# Allegro board ESP32_LED.brd
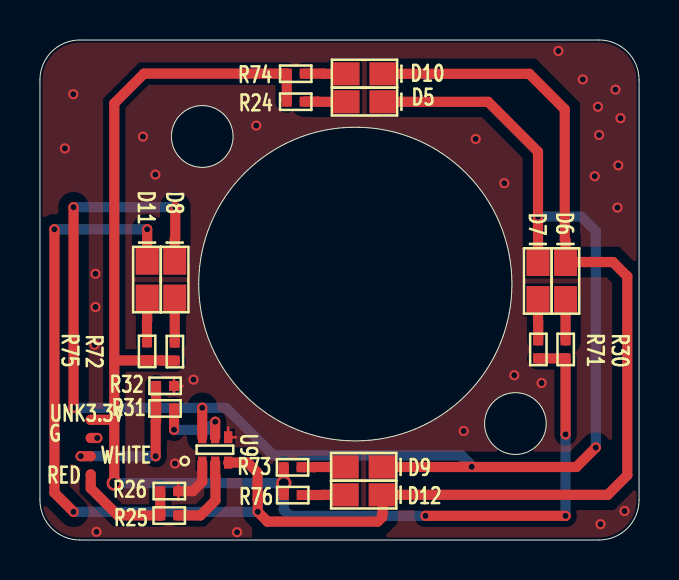
[diagram p0: board, top side]
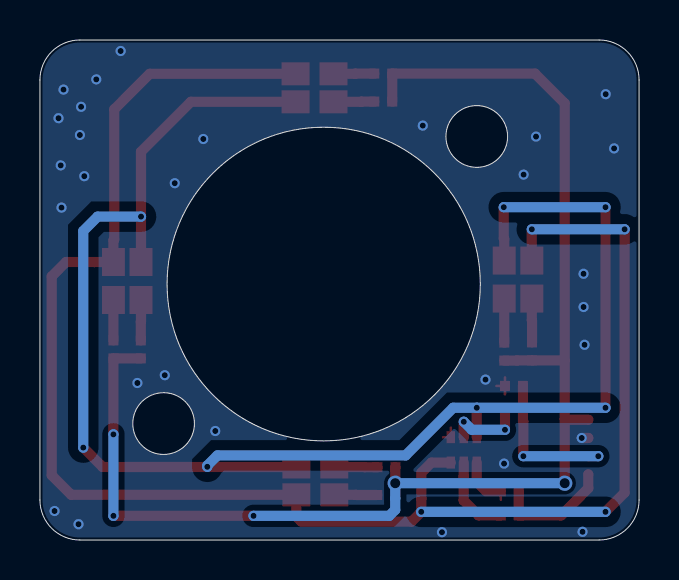
[diagram p1: board, bottom side, seen from below]

Outline 30 x 25 mm; copper layers: TOP, BOTTOM. Coordinates in mm from the lower left corner of the outline.
Outline path: circle c8.13,20.18 r1.54 ; circle c15.79,12.8 r7.84 ; circle c23.81,5.82 r1.54 ; 0,23 arc(0.59,24.41) 2,25 28,25 arc(29.41,24.41) 30,23 30,2 arc(29.41,0.59) 28,0 2,0 arc(0.59,0.59) 0,2 0,23

## Design rules (mm)
net group RF: nets N16845246 N16845297
net group GND: nets IO21 IO22 N16845223 N16845342
net group VDD33: nets N16845248 N16845299 N16938329 N16938336 N16938343 N16938391 N16938396 N16938401 VDD33

## Placement (name value [footprint] x y rotation side)
D5  RED LED  [LED0805]  15.3 21.91 0 top
D6  WHITE LED  [LED0805]  26.32 12 90 top
D7  RED LED  [LED0805]  24.94 12 90 top
D8  RED LED  [LED0805]  6.75 12.07 90 top
D9  RED LED  [LED0805]  15.26 3.65 0 top
D10  WHITE LED  [LED0805]  15.3 23.31 0 top
D11  WHITE LED  [LED0805]  5.37 12.07 90 top
D12  WHITE LED  [LED0805]  15.26 2.26 0 top
G  Red  [TP1]  2.54 5.1 0 top
R24  1K(1%)  [R0402]  13.26 21.92 180 top
R25  1K(1%)  [R0402]  6.93 1.23 180 top
R26  10K(1%)  [R0402]  6.02 2.44 0 top
R30  1K(1%)  [R0402]  26.32 9.98 270 top
R31  1K(1%)  [R0402]  6.72 6.58 180 top
R32  10K(1%)  [R0402]  5.81 7.7 0 top
R71  1K(1%)  [R0402]  24.95 9.98 270 top
R72  1K(1%)  [R0402]  6.75 9.87 270 top
R73  1K(1%)  [R0402]  13.1 3.64 180 top
R74  1K(1%)  [R0402]  13.26 23.32 180 top
R75  1K(1%)  [R0402]  5.36 9.88 270 top
R76  1K(1%)  [R0402]  13.11 2.25 180 top
RED  Red  [TP1]  2.54 3.28 0 top
U9  SI1902CDL  [SOT363]  8.13 3.87 0 top
UNK3.3V  Red  [TP1]  2.54 6.01 0 top
WHITE  Red  [TP1]  2.54 4.19 0 top

## Library data of the parts
D5-D12 = LED_6
G RED UNK3.3V WHITE = TEST POINT_0
R24-R26 R30-R32 R71-R76 = RESISTOR_0: signal model: DEFAULT_RESISTOR_200OHM_1_2
U9 = D-NMOS_1

## Footprints (pads in the part's own frame, mm; a bottom-side part is the same pattern mirrored in y, then rotated)
LED0805
  rect 1.4x1.15 smd: 1(0,0) 2(1.9,0)
R0402
  rect 0.5x0.5 smd: 1(0,0) 2(0.9,0)
SOT363
  rect 0.42x0.6 smd: 1(0,0) 2(0.65,0) 3(1.3,0) 4(1.3,1.27) 5(0.65,1.27) 6(0,1.27)
TP1
  round 0.5 smd: 1(0,0)

## Nets
GND: G.1 R26.2 R32.2 U9.1(S1) U9.4(S2)
VDD33: R24.2 R30.2 R71.2 R72.2 R73.2 R74.2 R75.2 R76.2 UNK3.3V.1
IO21: R25.2 R26.1 RED.1
IO22: R31.2 R32.1 WHITE.1
N16845223: R25.1 U9.2(G1)
N16845246: D5.2(CATHODE) D7.2(CATHODE) D8.2(CATHODE) D9.2(CATHODE) U9.6(D1)
N16845248: D5.1(ANODE) R24.1
N16845297: D6.2(CATHODE) D10.2(CATHODE) D11.2(CATHODE) D12.2(CATHODE) U9.3(D2)
N16845299: D6.1(ANODE) R30.1
N16845342: R31.1 U9.5(G2)
N16938329: D9.1(ANODE) R73.1
N16938336: D8.1(ANODE) R72.1
N16938343: D7.1(ANODE) R71.1
N16938391: D10.1(ANODE) R74.1
N16938396: D11.1(ANODE) R75.1
N16938401: D12.1(ANODE) R76.1

## Via types
v1: diameter 0.762, hole 0.508, TOP to BOTTOM, 2 vias
v2: diameter 0.508, hole 0.305, TOP to BOTTOM, 47 vias

## Routing (per net, layer and track width the routed paths; a pad name or vN(x,y) marks a point on that pad's centre or on a via; arc(x,y) is an arc through that point)
GND: length 5.7
  TOP w0.127: 9.81,5.14 U9.4 9.43,5.62 ; 6.92,2.87 R26.2 6.92,2.01 ; 6.71,7.28 R32.2 ; R32.2 7.14,7.7 ; R32.2 6.71,8.13
  TOP w0.508: G.1 v2(2.87,5.1) ; U9.1 8.13,2.91 7.65,2.44 R26.2
  vias: v2(1.25,19.58) v2(1.67,22.29) v2(2.73,9.76) v2(2.78,13.31) v2(2.78,11.65) v2(2.83,0.41) v2(5.16,20.17) v2(5.78,18.27) v2(6.76,3.82) v2(7.69,8.02) v2(9.87,0.39) v2(10.83,20.72) v2(21.22,5.45) v2(21.82,20.05) v2(23.25,17.84) v2(23.75,8.24) v2(25.12,7.85) v2(25.96,24.45) v2(27.18,23.03) v2(27.78,18.19) v2(27.94,21.66) v2(28,20.25) v2(28.07,0.79) v2(28.82,22.52) v2(28.92,16.62) v2(28.96,18.73) v2(29.07,21.09) v2(29.27,1.45)
VDD33: length 68.6
  TOP w0.508: v2(26.32,1.21) v2(19.3,1.21) ; 3.72,6.03 3.72,8.96 ; 3.72,6.03 3.7,6.01 UNK3.3V.1 ; 3.72,6.03 v1(3.72,2.84) ; 3.72,8.96 3.72,21.83 5.21,23.32 R74.2 R24.2 ; 3.72,8.96 3.74,8.98 R75.2 6.11,8.98 6.12,8.97 R72.2 ; R73.2 12.21,3.63 v1(12.21,2.84) R76.2 ; R71.2 R30.2 v2(26.32,5.28)
  BOTTOM w0.508: v2(26.32,5.28) v2(26.32,1.21) ; v2(19.3,1.21) 12.51,1.21 12.21,1.51 12.21,2.08 v1(12.21,2.84) v1(3.72,2.84)
IO21: length 5.9
  TOP w0.508: RED.1 2.54,2.59 3.9,1.23 R25.2 6.02,1.23 R26.1
IO22: length 7.8
  TOP w0.508: R32.1 5.81,6.58 R31.2 5.82,5.95 5.79,5.93 v2(5.79,4.19) ; WHITE.1 v2(2.04,4.19)
  BOTTOM w0.508: v2(2.04,4.19) v2(5.79,4.19)
N16845223: length 4.1
  TOP w0.508: U9.2 8.78,3.19 8.79,3.18 8.79,1.98 8.04,1.23 R25.1
N16845246: length 80.4
  TOP w0.508: v2(27.83,4.62) 26.86,3.65 21.03,3.65 ; D8.2 6.75,15.05 6.78,15.08 v2(6.78,16.64) ; 21.03,3.65 21.04,3.66 v2(21.62,3.66) ; 21.03,3.65 D9.2 ; 24.94,16.17 24.94,19.41 22.44,21.91 D5.2 ; 24.94,16.17 v2(24.94,16.17) ; 24.94,16.17 D7.2 ; U9.6 v2(8.13,6.61) ; v2(1.68,6.61) v2(1.68,16.64)
  BOTTOM w0.508: v2(27.83,4.62) 27.83,15.45 27.11,16.17 v2(24.94,16.17) ; v2(1.68,6.61) v2(8.13,6.61) 9.31,6.61 11.69,4.23 21.11,4.23 21.62,3.72 v2(21.62,3.66) ; v2(1.68,16.64) v2(6.78,16.64)
N16845248: length 2
  TOP w0.508: D5.1 13.9,21.91 13.89,21.92 R24.1
N16845297: length 84.7
  TOP w0.508: v2(0.72,15.53) 0.72,2.36 v2(1.68,1.41) ; D10.2 24.5,23.31 26.28,21.53 26.28,15.02 26.32,14.98 D6.2 27.28,13.9 27.28,13.9 28.69,13.9 29.41,13.18 29.41,3.24 28.43,2.26 D12.2 17.16,1.3 17.13,1.28 17.13,1.14 16.91,0.92 11.39,0.92 11.39,0.93 v2(10.91,1.41) 10.91,2.04 10.9,2.05 10.9,3.37 10.4,3.87 U9.3 ; D11.2 v2(5.37,15.53)
  BOTTOM w0.508: v2(1.68,1.41) v2(10.91,1.41) ; v2(5.37,15.53) v2(0.72,15.53)
N16845299: length 2
  TOP w0.508: R30.1 D6.1
N16845342: length 4.1
  TOP w0.508: v2(8.78,5.91) U9.5 ; R31.1 v2(6.72,5.51)
  BOTTOM w0.508: v2(8.78,5.91) 8.38,5.51 v2(6.72,5.51)
N16938329: length 2.2
  TOP w0.508: D9.1 13.74,3.65 13.73,3.64 R73.1
N16938336: length 2.2
  TOP w0.508: R72.1 D8.1
N16938343: length 2
  TOP w0.508: D7.1 24.94,10.92 24.95,10.91 R71.1
N16938391: length 2
  TOP w0.508: D10.1 14.22,23.31 14.21,23.32 R74.1
N16938396: length 2.2
  TOP w0.508: D11.1 5.37,10.99 5.36,10.98 R75.1
N16938401: length 2.2
  TOP w0.508: D12.1 14.18,2.26 14.17,2.25 R76.1

## Copper pours and planes (outline as drawn; the poured copper is in the pictures)
GND on TOP: 2,0.13 0.68,0.68 0.13,2 0.13,23 0.68,24.32 2,24.87 28,24.87 29.32,24.32 29.87,23 29.87,2 29.32,0.68 28,0.13 ; 5 cut-outs
GND on BOTTOM: 2,0.13 0.68,0.68 0.13,2 0.13,23 0.68,24.32 2,24.87 28,24.87 29.32,24.32 29.87,23 29.87,2 29.32,0.68 28,0.13

## Text on the board
NCLEGEND-1-2: FIGURE | SIZE | 12.0 | 20.0 | DRILL CHART: TOP to BOTTOM | ALL UNITS ARE IN MILS | PLATED | QTY | 47 | 2
